# Altium PCB PCB2maks.pcbdoc (part 2 of 2)
Units mm, origin at the board's own origin, x right, y up, seen from the top; angles counter-clockwise.
Board outline 120 x 90 mm, 2 copper layers (Top Layer, Bottom Layer); 58 components, 77 nets, 319 pads, 159 vias.
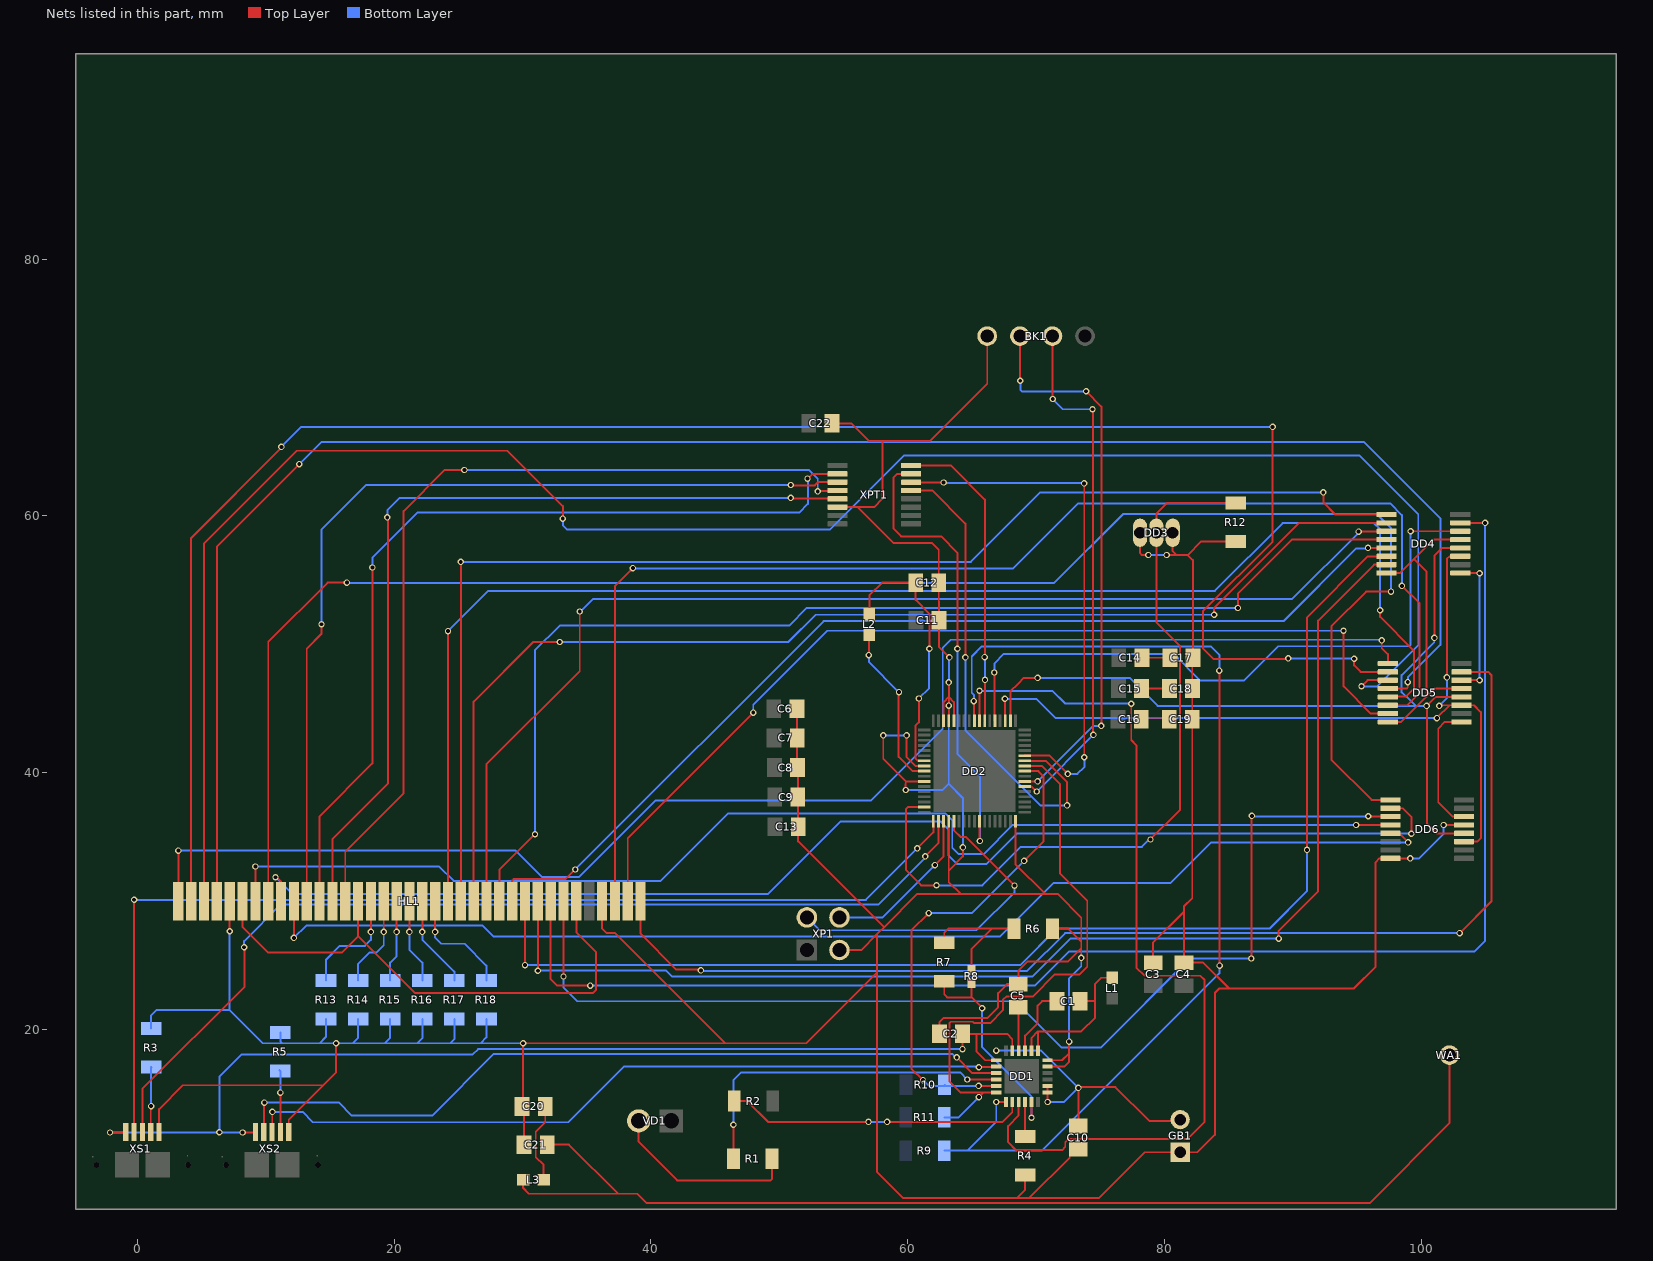
[diagram p2: the nets of this part, all layers, seen from the top]

## Via types
v1: diameter 0.5, hole 0.3, Top Layer to Bottom Layer, 159 vias

## Nets (pads, with @x,y where several pads share a name; then routed paths per layer and width w, separated by ;. In a path a pad name is that pad's centre, name@x,y a point inside that pad or via, vN(x,y) a via of type N, cw(c..) or ccw(c..) an arc to the next point about the centre after c; other vN are vias at no path point) (continued)
GND: BK1.4 C2.1 C3.1 C4.1 C5.2 C6.2 C7.2 C8.2 C9.2 C10.2 C11.2 C12.1 C13.1 C17.2 C18.2 C19.2 C20.1 C21.1 C22.1 DD1.17 DD1.18 DD2.30 DD2.31 DD2.32 DD2.42 DD2.45 DD2.55 DD2.68 DD3.1 DD3.3 DD6.8 DD6.13 GB1.1 HL1.5 HL1.34 R3.1 R4.2 R5.1 R6.2 R12.1 R13.2 R14.2 R15.2 R16.2 R17.2 R18.2 XP1.3 XPT1.6 XS1.5 XS2.5 | length 449.6
  Top Layer w0.15: XS1.5@1.7,12 1.7,13.8 3.55,15.65 14.475,15.65 ; v1(7.2,27.65) HL1.5@7.2,30 ; XS2.5@11.8,12 11.8,12.975 14.475,15.65 ; v1(15.487,18.925) 15.487,16.662 14.475,15.65 ; C21.1@30.125,11.025 30.125,13.85 C20.1@29.975,14 30.05,14.075 v1(30.05,18.925) 45.775,18.925 52.1,18.925 57.6,24.425 ; HL1.34@36.2,30 36.2,27.85 36.55,27.5 37.225,27.5 45.775,18.95 ; C6.2@51.375,44.975 51.375,42.725 C7.2@51.4,42.7 51.4,40.425 C8.2@51.425,40.4 51.45,40.375 C9.2@51.45,38.1 51.45,35.8 C13.1@51.637,35.613 ; C13.1@51.475,35.775 51.475,34.65 51.637,34.488 58.162,27.963 ; C22.1@54.1,67.2 55.6,67.2 56.961,65.839 58.039,65.839 ; XPT1.6@54.535,60.675 56.125,60.675 ; XP1.3@54.69,26.185 56.385,26.185 57.6,27.4 ; v1(58.1,42.9) 58.1,41.082 59.853,39.328 ; v1(59.85,38.65) 59.85,39.125 59.853,39.128 59.853,39.328 ; v1(59.925,42.9) 59.9,42.875 59.9,41.222 60.602,40.52 DD2.42@61.295,40.52 ; DD2.45@61.295,39.32 59.862,39.32 59.853,39.328 ; C2.1@62.475,19.675 62.475,20.546 62.829,20.9 66.225,20.9 67.05,21.725 67.05,22.829 67.746,23.525 C5.2@68.625,23.525 68.625,24.575 69.35,25.3 72.5,25.3 73.525,26.325 ; DD2.32@62.8,44.025 62.8,44.588 62.8,45.5 63.2,45.9 v1(63.2,45.225) DD2.31@63.2,44.025 ; DD2.55@63.2,36.215 63.2,32.375 ; v1(63.2,47.025) 63.208,47.017 63.208,45.892 63.6,45.5 DD2.30@63.6,44.025 ; v1(63.25,48.975) 62.45,49.775 C11.2@62.45,51.875 62.45,53.312 62.425,53.337 C12.1@62.425,54.8 62.425,57.376 61.917,57.884 58.916,57.884 56.125,60.675 ; v1(64.3,34.175) 64.3,33.475 63.2,32.375 ; BK1.4@66.2,74 66.2,70.275 61.764,65.839 58.039,65.839 ; DD2.68@68.4,36.215 68.4,32.85 70.7,30.55 ; R4.2@69.15,8.65 69.15,7.5 68.525,6.875 ; DD1.17@70.9,17.1 72.2,17.1 72.575,17.475 72.575,18.152 ; DD1.18@70.9,17.6 72.023,17.6 72.575,18.152 ; R6.2@71.275,27.85 72.5,27.85 73.525,26.825 ; v1(72.575,19.05) 72.575,18.152 ; C10.2@73.281,10.669 73.119,10.669 72.625,10.175 72.625,10.013 69.487,6.875 ; v1(73.525,25.575) 73.525,26.325 ; DD3.1@78.105,58.685 78.105,57.088 78.243,56.95 v1(78.75,56.95) ; C3.1@79.125,25.2 79.125,26.775 81.525,29.175 ; v1(80.175,56.95) 80.95,56.95 ; DD3.3@80.645,58.685 80.645,57.255 80.95,56.95 ; R12.1@85.55,58.01 82.885,58.01 81.825,56.95 ; v1(99.15,33.325) DD6.8@97.6,33.325 96.746,33.325 96.441,33.02 96.441,24.864 94.765,23.188 85.037,23.188 ; v1(101.75,35.925) DD6.13@103.34,35.925 ; 56.125,60.675 57.401,60.675 58.039,61.313 58.039,65.839 ; 57.6,24.425 57.6,27.4 ; 57.6,24.425 57.6,8.9 59.625,6.875 68.525,6.875 ; 57.6,27.4 58.162,27.963 ; 58.162,27.963 60.75,30.55 64.125,30.55 ; 63.2,32.375 63.2,31.475 64.125,30.55 ; 64.125,30.55 70.7,30.55 ; 68.525,6.875 69.487,6.875 ; 69.487,6.875 74.925,6.875 78.485,10.435 GB1.1@81.225,10.435 82.566,10.435 83.925,11.794 83.925,22.837 84.275,23.188 85.037,23.188 ; 70.7,30.55 71.675,30.55 73.525,28.7 73.525,26.825 ; 73.525,26.325 73.525,26.825 ; 80.95,56.95 81.825,56.95 ; 81.525,29.175 81.525,29.575 82.17,30.22 C19.2@82.17,44.15 82.17,46.55 82.17,48.895 C17.2@82.225,48.95 82.225,56.55 81.825,56.95 ; 81.525,29.175 C4.1@81.525,25.2 83.025,25.2 85.037,23.188
  Bottom Layer w0.15: R3.1@1.075,20.075 1.075,21.1 1.5,21.525 7.176,21.525 ; v1(7.2,27.65) 7.2,21.549 7.176,21.525 ; R5.1@11.15,19.75 11.15,19.075 11.3,18.925 ; R13.2@14.7,20.8 14.7,19.425 14.2,18.925 ; R14.2@17.2,20.8 17.2,19.35 16.775,18.925 ; R15.2@19.7,20.8 19.7,19.35 19.275,18.925 ; R16.2@22.2,20.8 22.2,19.325 21.8,18.925 ; R17.2@24.7,20.8 24.7,19.25 24.375,18.925 ; R18.2@27.2,20.8 27.2,19.375 26.75,18.925 ; v1(30.05,18.925) 26.75,18.925 ; v1(58.1,42.9) v1(59.925,42.9) ; v1(59.85,38.65) 62.725,38.65 63.2,39.125 ; v1(63.25,48.975) 63.225,48.95 63.225,47.05 v1(63.2,47.025) 63.194,47.019 63.2,47.013 v1(63.2,45.225) 63.2,39.125 ; v1(64.3,34.175) 64.3,38.025 63.2,39.125 ; v1(72.575,19.05) 72.575,23.975 73.525,24.925 v1(73.525,25.575) ; v1(78.75,56.95) v1(80.175,56.95) ; v1(99.15,33.325) 99.85,33.325 101.75,35.225 v1(101.75,35.925) ; 7.176,21.525 9.776,18.925 14.2,18.925 ; 14.2,18.925 v1(15.487,18.925) 16.775,18.925 ; 16.775,18.925 19.275,18.925 ; 19.275,18.925 21.8,18.925 ; 21.8,18.925 24.375,18.925 ; 24.375,18.925 26.75,18.925
GND_: DD4.8 DD4.13 DD5.8 DD5.13 | length 24.7
  Top Layer w0.15: DD4.8@97.305,55.55 98.349,55.55 99.437,56.638 100.949,58.15 DD4.13@103.045,58.15 ; DD5.8@97.4,43.95 98.445,43.95 100.4,45.905 ; 99.45,56.625 100.4,55.675 100.4,45.905 ; DD5.13@103.14,46.55 101.045,46.55 100.4,45.905
NetBK1_2: BK1.2 DD2.6 | length 41.1
  Top Layer w0.15: DD2.6@69.105,38.92 69.67,38.92 v1(70.06,38.529) ; BK1.2@71.28,74 71.29,73.99 71.29,69.11 v1(71.3,69.1) ; v1(74.4,68.3) 74.435,68.265 74.435,42.974 v1(74.47,42.939)
  Bottom Layer w0.15: v1(70.06,38.529) v1(74.47,42.939) ; v1(71.3,69.1) 72.1,68.3 v1(74.4,68.3)
NetBK1_3: BK1.3 DD2.7 | length 43.7
  Top Layer w0.15: BK1.3@68.74,74 68.757,73.983 68.757,70.542 v1(68.775,70.525) ; DD2.7@69.105,39.32 v1(70.127,39.32) ; v1(73.9,69.7) 75.085,68.515 v1(75.085,43.641)
  Bottom Layer w0.15: v1(68.775,70.525) 68.775,69.817 68.892,69.7 v1(73.9,69.7) ; v1(70.127,39.32) 74.448,43.641 v1(75.085,43.641)
NetC1_1: C1.1 DD1.19 DD1.20 L1.1 | length 13.4
  Top Layer w0.15: DD1.20@69.65,18.35 69.65,19.35 70.15,19.85 ; DD1.19@70.15,18.35 70.15,19.85 ; C1.1@73.425,22.2 74.6,22.2 ; L1.1@75.95,24.025 75.075,24.025 74.6,23.55 74.6,22.2 ; 70.15,19.85 73.525,19.85 74.6,20.925 74.6,22.2
NetC1_2: C1.2 DD1.21 | length 5.5
  Top Layer w0.15: DD1.21@69.15,18.35 69.15,19.525 70.125,20.5 70.125,21.85 70.475,22.2 C1.2@71.625,22.2
NetC2_2: C2.2 DD1.1 DD1.23 XS1.1 XS2.1 | length 95.3
  Top Layer w0.15: v1(-2.125,11.975) -0.925,11.975 XS1.1@-0.9,12 ; v1(8.2,11.975) 9.175,11.975 XS2.1@9.2,12 ; v1(64.275,18.463) C2.2@64.275,19.675 64.3,19.65 65.375,19.65 ; DD1.1@66.9,17.6 66.05,17.6 65.375,18.275 65.375,19.65 ; DD1.23@68.15,18.35 68.15,19.25 67.75,19.65 65.375,19.65
  Bottom Layer w0.15: v1(6.398,11.986) 6.398,16.304 8.144,18.05 26.127,18.05 26.54,18.463 v1(64.275,18.463) ; v1(-2.125,11.975) v1(8.2,11.975) v1(-2.125,11.975)
NetC5_1: C5.1 DD1.22 | length 3.4
  Top Layer w0.15: C5.1@68.625,21.725 68.65,21.7 DD1.22@68.65,18.35
NetC10_1: C10.1 DD1.13 DD1.14 GB1.2 | length 23.8
  Top Layer w0.15: v1(70.9,14.35) DD1.13@70.9,15.1 DD1.14@70.9,15.6 ; C10.1@73.275,12.475 73.3,12.5 v1(73.3,15.45) 73.364,15.514 76.186,15.514 78.825,12.875 81.125,12.875 GB1.2@81.225,12.975
  Bottom Layer w0.15: v1(66.9,18.35) 70.4,18.35 v1(73.3,15.45) 72.2,14.35 v1(70.9,14.35)
NetC12_2: C12.2 DD2.41 L2.1 | length 20.8
  Top Layer w0.15: L2.1@57.025,52.35 57.025,53.82 58.005,54.8 C12.2@60.625,54.8 60.625,54.658 60.625,53.447 61.7,52.373 v1(61.7,49.65) ; v1(60.875,45.775) 60.874,45.774 60.874,43.914 60.602,43.642 60.602,41.12 60.802,40.92 DD2.41@61.295,40.92
  Bottom Layer w0.15: v1(60.875,45.775) 61.669,46.569 61.669,49.619 v1(61.7,49.65)
NetC14_2: C14.2 C17.1 | length 2.2
  Top Layer w0.15: C14.2@78.25,48.95 C17.1@80.425,48.95
NetC15_2: C15.2 C18.1 | length 2.2
  Top Layer w0.15: C15.2@78.22,46.55 C18.1@80.395,46.55
NetC16_2: C16.2 C19.1 | length 4.6
  Top Layer w0.15: C16.2@78.195,44.15 C16.2@78.195,44.275 ; C19.1@80.37,44.15 C19.1@80.37,44.275 ; C16.2@78.195,44.275 C19.1@80.37,44.275 ; C16.2@78.195,44.275 C19.1@80.37,44.275
NetC20_2: C20.2 L3.1 | length 6.3
  Top Layer w0.15: L3.1@31.65,8.3 31.65,9.443 31.036,10.057 31.036,12.037 31.775,12.776 C20.2@31.775,14
NetC21_2: C21.2 L3.2 WA1.1 | length 88.3
  Top Layer w0.15: L3.2@30.05,8.3 30.05,7.65 30.5,7.2 37.45,7.2 ; C21.2@31.925,11.046 C21.2@31.925,11.025 33.625,11.025 37.45,7.2 ; WA1.1@102.2,18 102.2,12.7 95.975,6.475 39.675,6.475 38.95,7.2 37.45,7.2
NetDD1_2: DD1.2 XS2.3 | length 60.1
  Top Layer w0.15: XS2.3@10.5,12 10.512,12.012 10.512,13.562 v1(10.525,13.575) ; v1(65.55,17.05) 65.575,17.075 66.875,17.075 DD1.2@66.9,17.1
  Bottom Layer w0.15: v1(10.525,13.575) 12.875,13.575 13.676,12.774 33.574,12.774 37.9,17.1 65.5,17.1 v1(65.55,17.05)
NetDD1_3: DD1.3 XS2.2 | length 62.4
  Top Layer w0.15: XS2.2@9.85,12 9.875,12.025 9.875,14.275 v1(9.9,14.3) ; v1(63.825,17.825) 65.05,16.6 DD1.3@66.9,16.6
  Bottom Layer w0.15: v1(9.9,14.3) 9.925,14.325 15.675,14.325 16.718,13.282 22.959,13.282 27.768,18.091 63.464,18.091 63.73,17.825 v1(63.825,17.825)
NetDD1_4: DD1.4 R1.1 | length 27.1
  Top Layer w0.15: R1.1@46.425,9.925 v1(46.425,12.575) ; v1(64.64,16.1) DD1.4@66.9,16.1
  Bottom Layer w0.15: v1(46.425,12.575) 46.425,16.05 47.025,16.65 64.09,16.65 v1(64.64,16.1)
NetDD1_5: DD1.5 DD2.9 R10.2 | length 39.1
  Top Layer w0.15: v1(61.2,16.05) 60.3,16.95 60.3,27.712 v1(61.643,29.055) ; v1(65.525,15.6) DD1.5@66.9,15.6 ; v1(69.075,33.125) 70.58,34.63 70.58,39.718 70.177,40.12 DD2.9@69.105,40.12
  Bottom Layer w0.15: v1(61.2,16.05) 61.65,15.6 ; v1(61.643,29.055) 65.005,29.055 v1(69.075,33.125) ; R10.2@62.875,15.675 62.95,15.6 v1(65.525,15.6) ; 61.65,15.6 62.875,15.6 61.65,15.6
NetDD1_6: DD1.6 DD2.10 R11.2 | length 44
  Top Layer w0.15: v1(65.55,14.725) 65.925,15.1 ; DD1.6@66.9,15.1 65.925,15.1 ; DD2.10@69.105,40.52 70.455,40.52 71.875,39.1 71.875,32.125 73.988,30.012 73.988,24.864 73.403,24.28 71.473,24.28 69.771,22.578 67.703,22.578 67.425,22.3 67.425,21.5 66.42,20.495 65.177,20.495 65.072,20.6 63.363,20.6 63.275,20.512 63.275,15.942 64.117,15.1 65.925,15.1
  Bottom Layer w0.15: R11.2@62.85,13.15 63.975,13.15 v1(65.55,14.725)
NetDD1_7: DD1.7 DD2.26 R9.2 | length 82.5
  Top Layer w0.15: v1(65.15,45.575) 65.175,45.55 65.175,44.05 DD2.26@65.2,44.025 ; v1(66.9,14.35) DD1.7@67.65,14.35 ; v1(84.275,47.95) 84.288,47.938 84.288,24.987 v1(84.3,24.975)
  Bottom Layer w0.15: R9.2@62.85,10.55 R9.2@62.875,10.575 ; v1(65.15,45.575) 65.174,45.599 65.174,46.026 64.996,46.204 64.996,49.046 65.775,49.825 83.625,49.825 84.275,49.175 v1(84.275,47.95) ; v1(66.9,14.35) 66.9,12.799 64.677,10.575 ; v1(84.3,24.975) 84.275,24.95 84.275,24.366 70.484,10.575 64.677,10.575 ; R9.2@62.875,10.575 62.85,10.575 R9.2@62.875,10.575 ; R9.2@62.875,10.575 64.677,10.575
NetDD1_8: DD1.8 R2.1 | length 23.4
  Top Layer w0.15: R2.1@46.5,14.425 47.5,14.425 49.125,12.8 v1(56.95,12.8) ; v1(58.4,12.8) 67.4,12.8 68.15,13.55 DD1.8@68.15,14.35
  Bottom Layer w0.15: v1(56.95,12.8) v1(58.4,12.8)
NetDD1_9: DD1.9 DD2.25 | length 72.2
  Top Layer w0.15: DD2.25@65.6,44.025 v1(65.6,46.375) ; DD1.9@68.65,14.35 68.65,13.3 67.825,12.475 67.825,11.215 68.44,10.599 72.027,10.599 72.276,10.848 72.276,11.223 72.505,11.453 81.76,11.453 83.125,12.818 83.125,23.85 82.797,24.178 78.458,24.178 77.825,24.811 77.825,42.134 77.417,42.542 v1(77.417,45.362)
  Bottom Layer w0.15: v1(65.6,46.375) 71.275,46.375 72.265,45.385 77.393,45.385 v1(77.417,45.362)
NetDD1_10: DD1.10 R4.1 | length 2.8
  Top Layer w0.15: DD1.10@69.15,14.35 R4.1@69.15,11.65 R4.1@69.2,11.6
NetDD1_11: DD1.11 R7.2 R8.1 | length 16.9
  Top Layer w0.15: R7.2@62.85,23.75 62.85,22.725 63.075,22.5 64.975,22.5 ; R8.1@64.975,23.625 64.975,22.5 ; v1(65.8,21.65) 65.8,21.675 64.975,22.5 ; v1(69.65,13.125) DD1.11@69.65,14.35
  Bottom Layer w0.15: v1(65.8,21.65) 65.8,18.625 69.65,14.775 v1(69.65,13.125)
NetDD2_11: DD2.11 XPT1.13 | length 37.6
  Top Layer w0.15: XPT1.13@60.275,61.975 61.925,61.975 64.5,59.4 v1(64.5,48.975) ; DD2.11@69.105,40.92 70.767,40.92 72.425,39.262 v1(72.425,37.45)
  Bottom Layer w0.15: v1(64.5,48.975) 64.5,43.292 70.355,37.437 72.412,37.437 v1(72.425,37.45)
NetDD2_12: DD2.12 XPT1.14 | length 41.1
  Top Layer w0.15: XPT1.14@60.275,62.625 60.287,62.612 62.788,62.612 v1(62.8,62.6) ; DD2.12@69.105,41.32 71.055,41.32 v1(72.475,39.9) ; v1(73.75,62.525) 73.754,62.521 73.754,41.201 v1(73.759,41.196)
  Bottom Layer w0.15: v1(62.8,62.6) 62.838,62.563 73.712,62.563 v1(73.75,62.525) ; v1(72.475,39.9) 73.225,39.9 73.759,40.434 v1(73.759,41.196)
NetDD2_19: DD2.19 DD4.12 DD5.12 DD6.12 | length 66.9
  Top Layer w0.15: DD2.19@68,44.025 68,46.325 68.6,46.925 69.05,47.375 v1(70.125,47.375) ; v1(101.025,50.5) 101.025,56.902 101.623,57.5 DD4.12@103.045,57.5 ; DD5.12@103.14,45.9 101.125,45.9 v1(100.425,45.2) 100.441,45.184 100.441,36.075 101.242,35.275 DD6.12@103.34,35.275
  Bottom Layer w0.15: v1(70.125,47.375) 77.287,47.375 79.462,45.2 99.568,45.2 ; v1(100.425,45.2) 99.568,45.2 ; v1(101.025,50.5) 101.014,50.489 101.014,50.139 98.475,47.6 98.475,46.258 98.799,45.934 98.834,45.934 99.568,45.2
NetDD2_20: DD2.20 DD4.11 DD5.11 DD6.11 | length 65
  Top Layer w0.15: v1(67.575,45.75) 67.6,45.725 DD2.20@67.6,44.025 ; v1@101.225,44.257 102.218,45.25 ; v1(101.4,45.2) 101.45,45.25 101.881,45.25 102.218,45.25 ; v1(102.004,47.419) 102.004,56.647 102.207,56.85 DD4.11@103.045,56.85 ; DD6.11@103.34,34.625 104.366,34.625 104.645,34.904 104.645,44.717 104.112,45.25 DD5.11@103.14,45.25 102.324,45.25 102.218,45.25
  Bottom Layer w0.15: v1(67.575,45.75) 70.025,45.75 71.525,44.25 v1(101.225,44.25) ; v1(101.4,45.2) 102.004,45.804 v1(102.004,47.419)
NetDD2_22: DD2.22 DD4.14 | length 51.9
  Top Layer w0.15: v1(66.75,47.8) 66.775,47.775 66.775,44.05 DD2.22@66.8,44.025 ; v1(99.175,58.8) DD4.14@103.045,58.8
  Bottom Layer w0.15: v1(66.75,47.8) 66.75,48.5 67.5,49.25 80.715,49.25 82.793,47.172 86.197,47.172 88.871,49.846 99.042,49.846 99.175,49.979 v1(99.175,58.8)
NetDD2_24: DD2.24 XPT1.16 | length 24.1
  Top Layer w0.15: XPT1.16@60.275,63.925 63.37,63.925 66.025,61.27 66.025,49.025 v1(66,49) ; DD2.24@66,44.025 66.025,44.05 v1(66.025,47.225)
  Bottom Layer w0.15: v1(66,49) 66.013,48.987 66.013,47.237 v1(66.025,47.225)
NetDD2_43: DD2.43 L2.2 | length 13
  Top Layer w0.15: v1(56.975,49.15) 56.975,50.7 L2.2@57.025,50.75 ; v1(59.325,46.275) 59.3,46.25 59.3,41.228 60.408,40.12 DD2.43@61.295,40.12
  Bottom Layer w0.15: v1(56.975,49.15) 56.975,48.625 v1(59.325,46.275)
NetDD2_50: DD2.50 DD3.2 R12.2 | length 60.8
  Top Layer w0.15: DD2.50@61.295,37.32 61.285,37.31 60.01,37.31 59.875,37.175 59.875,32.4 61.05,31.225 v1(62.25,31.225) ; v1(78.915,34.795) 81.201,37.081 81.201,49.883 79.375,51.709 DD3.2@79.375,58.685 79.375,60.15 80.235,61.01 R12.2@85.55,61.01
  Bottom Layer w0.15: v1(62.25,31.225) 65.825,31.225 68.825,34.225 78.25,34.225 78.821,34.795 v1(78.915,34.795)
NetDD2_52: DD2.52 XS1.2 | length 83.4
  Top Layer w0.15: XS1.2@-0.25,12 -0.25,15.825 v1(-0.25,30.096) ; v1(60.75,34.1) 62,35.35 DD2.52@62,36.215
  Bottom Layer w0.15: v1(-0.25,30.096) 56.746,30.096 v1(60.75,34.1)
NetDD2_53: DD2.53 XS1.3 | length 77.2
  Top Layer w0.15: XS1.3@0.4,12 0.4,15.387 8.354,23.341 8.354,26.371 v1(8.325,26.4) ; v1(61.375,33.475) 62.4,34.5 DD2.53@62.4,36.215
  Bottom Layer w0.15: v1(8.325,26.4) 8.325,26.875 11.191,29.741 57.736,29.741 61.375,33.38 v1(61.375,33.475)
NetDD2_54: DD2.54 XP1.4 | length 12.8
  Top Layer w0.15: v1@62.137,32.8 v1(62.125,32.8) 62.8,33.475 DD2.54@62.8,36.215
  Bottom Layer w0.15: XP1.4@54.69,28.725 58.062,28.725 60.177,30.84 60.177,30.852 v1(62.125,32.8)
NetDD2_56: DD2.56 XP1.2 | length 25.5
  Top Layer w0.15: DD2.56@63.6,36.215 63.6,35.532 64.157,34.975 64.55,34.975 v1(68.325,31.2)
  Bottom Layer w0.15: XP1.2@52.15,28.725 53.15,27.725 65.35,27.725 68.325,30.7 v1(68.325,31.2)
NetDD2_61: DD2.61 XPT1.15 | length 36
  Top Layer w0.15: XPT1.15@60.275,63.275 59.175,63.275 58.9,63 58.9,59 59.5,58.4 62.6,58.4 63.878,57.122 63.878,49.653 v1(63.875,49.65) ; DD2.61@65.6,36.215 65.613,36.203 65.613,34.687 v1(65.625,34.675)
  Bottom Layer w0.15: v1(63.875,49.65) 63.875,41.454 65.625,39.704 v1(65.625,34.675)
NetDD4_1: DD4.1 HL1.23 | length 101.9
  Top Layer w0.15: HL1.23@25.2,30 v1(25.2,56.411) ; v1(92.375,61.825) 92.375,61.05 93.325,60.1 DD4.1@97.305,60.1
  Bottom Layer w0.15: v1(25.2,56.411) 64.92,56.411 70.334,61.825 v1(92.375,61.825)
NetDD4_2: DD4.2 HL1.24 | length 92.7
  Top Layer w0.15: HL1.24@26.2,30 26.2,45.525 30.85,50.175 v1(32.9,50.175) ; v1(83.875,52.3) 83.875,52.825 90.5,59.45 DD4.2@97.305,59.45
  Bottom Layer w0.15: v1(32.9,50.175) 50.7,50.175 52.825,52.3 v1(83.875,52.3)
NetDD4_3: DD4.3 HL1.25 | length 91
  Top Layer w0.15: HL1.25@27.2,30 27.2,40.65 34.465,47.915 v1(34.465,52.55) ; v1(95.125,58.775) 95.138,58.788 97.293,58.788 DD4.3@97.305,58.8
  Bottom Layer w0.15: v1(34.465,52.55) 34.521,52.55 35.496,53.525 89.95,53.525 95.125,58.7 v1(95.125,58.775)
NetDD4_4: DD4.4 HL1.26 | length 91.2
  Top Layer w0.15: HL1.26@28.2,30 28.2,32.425 v1(30.975,35.2) ; v1(85.725,52.825) 85.725,53.95 89.925,58.15 DD4.4@97.305,58.15
  Bottom Layer w0.15: v1(30.975,35.2) 30.975,49.517 32.908,51.45 50.775,51.45 52.15,52.825 v1(85.725,52.825)
NetDD4_5: DD4.5 HL1.27 | length 80.4
  Top Layer w0.15: HL1.27@29.2,30 29.2,31.595 29.327,31.722 33.373,31.722 v1(34.11,32.459) ; v1(95.857,57.5) DD4.5@97.305,57.5
  Bottom Layer w0.15: v1(34.11,32.459) 53.451,51.8 89.275,51.8 94.918,57.443 95.8,57.443 v1(95.857,57.5)
NetDD4_6: DD4.6 HL1.28 | length 97.8
  Top Layer w0.15: v1(30.2,25.009) HL1.28@30.2,30 ; v1(91.107,33.983) 91.107,52.105 95.853,56.85 DD4.6@97.305,56.85
  Bottom Layer w0.15: v1(30.2,25.009) 42.77,25.009 42.788,25.027 68.794,25.027 71.628,27.861 88.186,27.861 91.107,30.782 v1(91.107,33.983)
NetDD4_7: DD4.7 HL1.29 | length 97.7
  Top Layer w0.15: v1(31.2,24.575) HL1.29@31.2,30 ; v1(88.9,27.075) 88.9,27.675 91.975,30.75 91.975,51.843 96.332,56.2 DD4.7@97.305,56.2
  Bottom Layer w0.15: v1(31.2,24.575) 41.2,24.575 41.648,24.127 69.727,24.127 72.681,27.081 88.894,27.081 v1(88.9,27.075)
NetDD4_9: DD4.9 DD5.14 | length 11.3
  Top Layer w0.15: DD4.9@103.045,55.55 103.058,55.538 104.537,55.538 v1(104.55,55.525) ; DD5.14@103.14,47.2 v1(104.55,47.2)
  Bottom Layer w0.15: v1(104.55,47.2) v1(104.55,55.525)
NetDD4_15: DD4.15 HL1.30 | length 115
  Top Layer w0.15: HL1.30@32.2,30 32.2,23.925 32.709,23.416 v1(35.278,23.416) ; DD4.15@103.045,59.45 v1(104.976,59.45)
  Bottom Layer w0.15: v1(35.278,23.416) 69.916,23.416 72.558,26.058 104.137,26.058 104.976,26.896 v1(104.976,59.45)
NetDD5_1: DD5.1 HL1.1 | length 111.9
  Top Layer w0.15: HL1.1@3.2,30 v1(3.2,33.932) ; v1(96.925,50.296) 96.925,49.7 97.4,49.225 DD5.1@97.4,48.5
  Bottom Layer w0.15: v1(3.2,33.932) 29.461,33.932 31.519,31.874 34.414,31.874 40.358,37.818 57.122,37.818 62.735,43.431 62.735,49.71 63.375,50.35 96.871,50.35 v1(96.925,50.296)
NetDD5_2: DD5.2 HL1.2 | length 151.1
  Top Layer w0.15: HL1.2@4.2,30 4.2,58.275 11.225,65.3 v1(11.225,65.375) ; v1(88.425,66.925) 88.425,58 83.005,52.58 83.005,49.68 83.834,48.85 89.6,48.85 v1(89.65,48.9) ; v1(94.775,48.875) 94.775,48.35 95.275,47.85 DD5.2@97.4,47.85
  Bottom Layer w0.15: v1(11.225,65.375) 12.775,66.925 v1(88.425,66.925) ; v1(89.65,48.9) 89.662,48.888 94.763,48.888 v1(94.775,48.875)
NetDD5_3: DD5.3 HL1.3 | length 151.3
  Top Layer w0.15: HL1.3@5.2,30 5.2,57.85 12.422,65.072 28.828,65.072 33.144,60.756 v1(33.144,59.789) ; v1(95.35,46.725) 95.825,47.2 DD5.3@97.4,47.2
  Bottom Layer w0.15: v1(33.144,59.789) 33.144,59.281 33.5,58.925 53.925,58.925 59.7,64.7 95.2,64.7 99.769,60.131 99.769,49.926 96.567,46.725 v1(95.35,46.725)
NetDD5_4: DD5.4 HL1.4 | length 144.6
  Top Layer w0.15: HL1.4@6.2,30 6.2,57.61 v1(12.621,64.031) ; DD5.4@97.4,46.55 98.862,46.55 98.95,46.638 v1(98.95,47.05)
  Bottom Layer w0.15: v1(12.621,64.031) 14.34,65.75 95.55,65.75 101.5,59.8 101.5,49.95 98.961,47.411 98.961,47.061 v1(98.95,47.05)
NetDD5_5: DD5.5 HL1.22 | length 113.1
  Top Layer w0.15: HL1.22@24.2,30 v1(24.2,51.022) ; v1(96.8,52.65) 96.8,52.125 99.425,49.5 99.425,46.525 98.834,45.934 97.434,45.934 DD5.5@97.4,45.9
  Bottom Layer w0.15: v1(24.2,51.022) 27.328,54.15 83.925,54.15 89.208,59.433 96.314,59.433 96.8,58.948 v1(96.8,52.65)
NetDD5_6: DD5.6 HL1.35 | length 106.2
  Top Layer w0.15: HL1.35@37.2,30 37.2,54.525 v1(38.6,55.925) ; DD5.6@97.4,45.25 98.9,45.25 99.875,46.225 99.875,53.175 v1(98.5,54.55)
  Bottom Layer w0.15: v1(38.6,55.925) 38.622,55.903 68.222,55.903 73.294,60.975 97.576,60.975 98.5,60.051 v1(98.5,54.55)
NetDD5_7: DD5.7 HL1.36 | length 76.4
  Top Layer w0.15: HL1.36@38.2,30 38.2,34.898 v1(47.978,44.676) ; v1(93.95,51.05) 93.95,46.725 96.075,44.6 DD5.7@97.4,44.6
  Bottom Layer w0.15: v1(47.978,44.676) 47.978,45.303 53.725,51.05 v1(93.95,51.05)
NetDD5_9: DD5.9 DD6.14 | length 10.2
  Top Layer w0.15: DD5.9@103.14,43.95 101.842,43.95 101.325,43.433 101.325,37.711 102.461,36.575 DD6.14@103.34,36.575
NetDD5_15: DD5.15 HL1.37 | length 92.3
  Top Layer w0.15: HL1.37@39.2,30 39.2,27.45 41.983,24.667 43.833,24.667 v1(43.9,24.6) ; v1(102.994,27.506) 105.475,29.986 105.475,47.6 105.225,47.85 DD5.15@103.14,47.85
  Bottom Layer w0.15: v1(43.9,24.6) 43.941,24.559 69.318,24.559 72.264,27.506 v1(102.994,27.506)
NetDD6_1: DD6.1 HL1.8 | length 139.2
  Top Layer w0.15: HL1.8@10.2,30 10.2,50.18 14.82,54.8 v1(16.325,54.8) ; DD6.1@97.6,37.875 96.136,37.875 93,41.011 93,51.395 95.705,54.1 v1(97.65,54.1)
  Bottom Layer w0.15: v1(16.325,54.8) 16.34,54.785 71.422,54.785 76.782,60.145 96.536,60.145 97.65,59.03 v1(97.65,54.1)
NetDD6_2: DD6.2 HL1.9 | length 100.2
  Top Layer w0.15: v1(10.767,31.849) 10.869,31.849 11.2,31.518 HL1.9@11.2,30 ; DD6.2@97.6,37.225 98.558,37.225 99.235,36.548 v1(99.235,35.246)
  Bottom Layer w0.15: v1(10.767,31.849) 12.062,30.554 49.129,30.554 54.767,36.192 62.583,36.192 63.175,35.6 63.175,33.575 63.875,32.875 66.125,32.875 68.496,35.246 v1(99.235,35.246)
NetDD6_3: DD6.3 HL1.31 | length 87.1
  Top Layer w0.15: v1(33.2,24.125) HL1.31@33.2,30 ; v1(86.764,25.524) 86.79,25.551 86.79,36.606 v1(86.817,36.633) ; v1(95.875,36.6) 95.887,36.588 97.588,36.588 DD6.3@97.6,36.575
  Bottom Layer w0.15: v1(33.2,24.125) 33.2,23.247 34.25,22.197 68.4,22.197 72.006,18.59 75.054,18.59 81.989,25.524 v1(86.764,25.524) ; v1(86.817,36.633) 86.98,36.633 87.013,36.6 v1(95.875,36.6)
NetDD6_4: DD6.4 HL1.7 | length 97.2
  Top Layer w0.15: HL1.7@9.2,30 v1(9.2,32.687) ; v1(94.925,35.925) DD6.4@97.6,35.925
  Bottom Layer w0.15: v1(9.2,32.687) 23.518,32.687 24.635,31.57 40.764,31.57 45.997,36.802 62.964,36.802 63.475,36.291 63.475,34.15 63.975,33.65 65.925,33.65 68.2,35.925 94.375,35.925 v1(94.925,35.925)
NetDD6_5: DD6.5 HL1.10 | length 95.1
  Top Layer w0.15: v1(12.2,27.125) HL1.10@12.2,30 ; DD6.5@97.6,35.275 98.397,35.151 v1(98.981,34.567)
  Bottom Layer w0.15: v1(12.2,27.125) 13.165,28.09 26.896,28.09 27.736,27.25 67.204,27.25 71.346,31.392 80.465,31.392 83.64,34.567 v1(98.981,34.567)
NetHL1_6: HL1.6 HL1.15 HL1.32 | length 43.1
  Top Layer w0.15: HL1.6@8.2,30 8.2,27.975 10.193,25.982 15.911,25.982 17.2,27.27 ; HL1.15@17.2,30 17.2,27.27 ; HL1.32@34.2,30 34.2,27.556 35.735,26.021 35.735,23.086 35.481,22.832 21.638,22.832 17.2,27.27
NetHL1_11: HL1.11 XPT1.3 | length 71.1
  Top Layer w0.15: HL1.11@13.2,30 13.2,49.65 14.348,50.798 v1(14.348,51.559) ; v1(50.9,62.4) 50.925,62.375 52.769,62.375 53.019,62.625 XPT1.3@54.535,62.625
  Bottom Layer w0.15: v1(14.348,51.559) 14.348,58.9 17.854,62.405 50.895,62.405 v1(50.9,62.4)
NetHL1_12: HL1.12 XPT1.2 | length 68.6
  Top Layer w0.15: HL1.12@14.2,30 14.2,36.603 18.311,40.714 v1(18.311,55.979) ; v1(52.2,62.9) 52.228,62.9 52.603,63.275 XPT1.2@54.535,63.275
  Bottom Layer w0.15: v1(18.311,55.979) 18.311,56.736 21.821,60.246 51.546,60.246 52.238,60.938 52.238,62.862 v1(52.2,62.9)
NetHL1_13: HL1.13 XPT1.5 | length 67.7
  Top Layer w0.15: HL1.13@15.2,30 15.2,34.809 19.525,39.134 19.525,59.825 v1(19.475,59.875) ; v1(50.9,61.4) 50.938,61.362 54.498,61.362 XPT1.5@54.535,61.325
  Bottom Layer w0.15: v1(19.475,59.875) 19.475,60.45 20.425,61.4 v1(50.9,61.4)
NetHL1_14: HL1.14 XPT1.4 | length 68.7
  Top Layer w0.15: HL1.14@16.2,30 16.2,33.853 20.749,38.402 20.749,60.374 23.949,63.574 v1(25.474,63.574) ; v1(53,61.9) 53.037,61.937 54.498,61.937 XPT1.4@54.535,61.975
  Bottom Layer w0.15: v1(25.474,63.574) 52.304,63.574 53,62.878 v1(53,61.9)
NetHL1_16: HL1.16 R13.1 | length 8.8
  Top Layer w0.15: v1(18.2,27.6) HL1.16@18.2,30
  Bottom Layer w0.15: R13.1@14.7,23.8 14.7,25.425 15.775,26.5 17.725,26.5 18.2,26.975 v1(18.2,27.6)
NetHL1_17: HL1.17 R14.1 | length 7.4
  Top Layer w0.15: v1(19.2,27.6) HL1.17@19.2,30
  Bottom Layer w0.15: R14.1@17.2,23.8 17.2,25.1 18.1,26 18.65,26 19.2,26.55 v1(19.2,27.6)
NetHL1_18: HL1.18 R15.1 | length 6.4
  Top Layer w0.15: v1(20.2,27.6) HL1.18@20.2,30
  Bottom Layer w0.15: R15.1@19.7,23.8 19.7,25.2 20.2,25.7 v1(20.2,27.6)
NetHL1_19: HL1.19 R16.1 | length 6.6
  Top Layer w0.15: v1(21.2,27.6) HL1.19@21.2,30
  Bottom Layer w0.15: v1(21.2,27.6) 21.2,26.2 22.2,25.2 R16.1@22.2,23.8
NetHL1_20: HL1.20 R17.1 | length 7.2
  Top Layer w0.15: v1(22.2,27.6) HL1.20@22.2,30
  Bottom Layer w0.15: v1(22.2,27.6) 22.2,27 24.7,24.5 R17.1@24.7,23.8
NetHL1_21: HL1.21 R18.1 | length 8.9
  Top Layer w0.15: v1(23.2,27.6) HL1.21@23.2,30
  Bottom Layer w0.15: v1(23.2,27.6) 23.2,27.15 23.675,26.675 25.5,26.675 27.2,24.975 R18.1@27.2,23.8
NetR1_2: R1.2 VD1.2 | length 14.9
  Top Layer w0.15: VD1.2@39.05,12.875 39.05,11.25 42.05,8.25 49.337,8.25 49.425,8.338 R1.2@49.425,9.925
NetR3_2: R3.2 XS1.4 | length 5.2
  Top Layer w0.15: XS1.4@1.05,12 1.05,13.75 ; v1(1.075,14.025) 1.075,13.75 ; 1.05,13.75 1.075,13.75 ; 1.05,13.75 1.075,13.75
  Bottom Layer w0.15: v1(1.075,14.025) 1.075,15.825 R3.2@1.075,17.075 R3.2@1.125,17.025
NetR5_2: R5.2 XS2.4 | length 4.9
  Top Layer w0.15: XS2.4@11.15,12 v1(11.15,15.075)
  Bottom Layer w0.15: R5.2@11.075,16.825 R5.2@11.15,16.75 v1(11.15,15.075)
NetR6_1: R6.1 R7.1 R8.2 | length 10.2
  Top Layer w0.15: R7.1@62.85,26.75 62.85,27.525 63.175,27.85 66.55,27.85 ; R8.2@64.975,24.625 64.975,26.275 66.55,27.85 ; R6.1@68.275,27.85 66.55,27.85
pads on no net: DD1.12 DD1.24 DD1.25 DD2.1 DD2.2 DD2.3 DD2.4 DD2.5 DD2.8 DD2.15 DD2.16 DD2.17 DD2.18 DD2.21 DD2.23 DD2.27 DD2.28 DD2.29 DD2.34 DD2.35 DD2.36 DD2.37 DD2.38 DD2.39 DD2.40 DD2.46 DD2.47 DD2.48 DD2.49 DD2.51 DD2.57 DD2.58 DD2.59 DD2.60 DD2.62 DD2.63 DD2.64 DD2.65 DD2.66 DD2.67 DD2.69 DD6.6 DD6.7 DD6.9 DD6.15 XPT1.7 XPT1.8 XPT1.9 XPT1.10 XPT1.11 XPT1.12 XS1. XS1.6 XS1.7 XS1.8 XS1.9 XS2. XS2.6 XS2.7 XS2.8 XS2.9

## Keep-outs
Keep-Out Layer:
  the board outline again, w0.1

## Text inside footprints (layer, text, board x,y; h text height)
GB1: Top Overlay "+" at 81.802,8.035 h1.15 r90